# EAGLE board IRTransmitter (EAGLE 6.6.0)
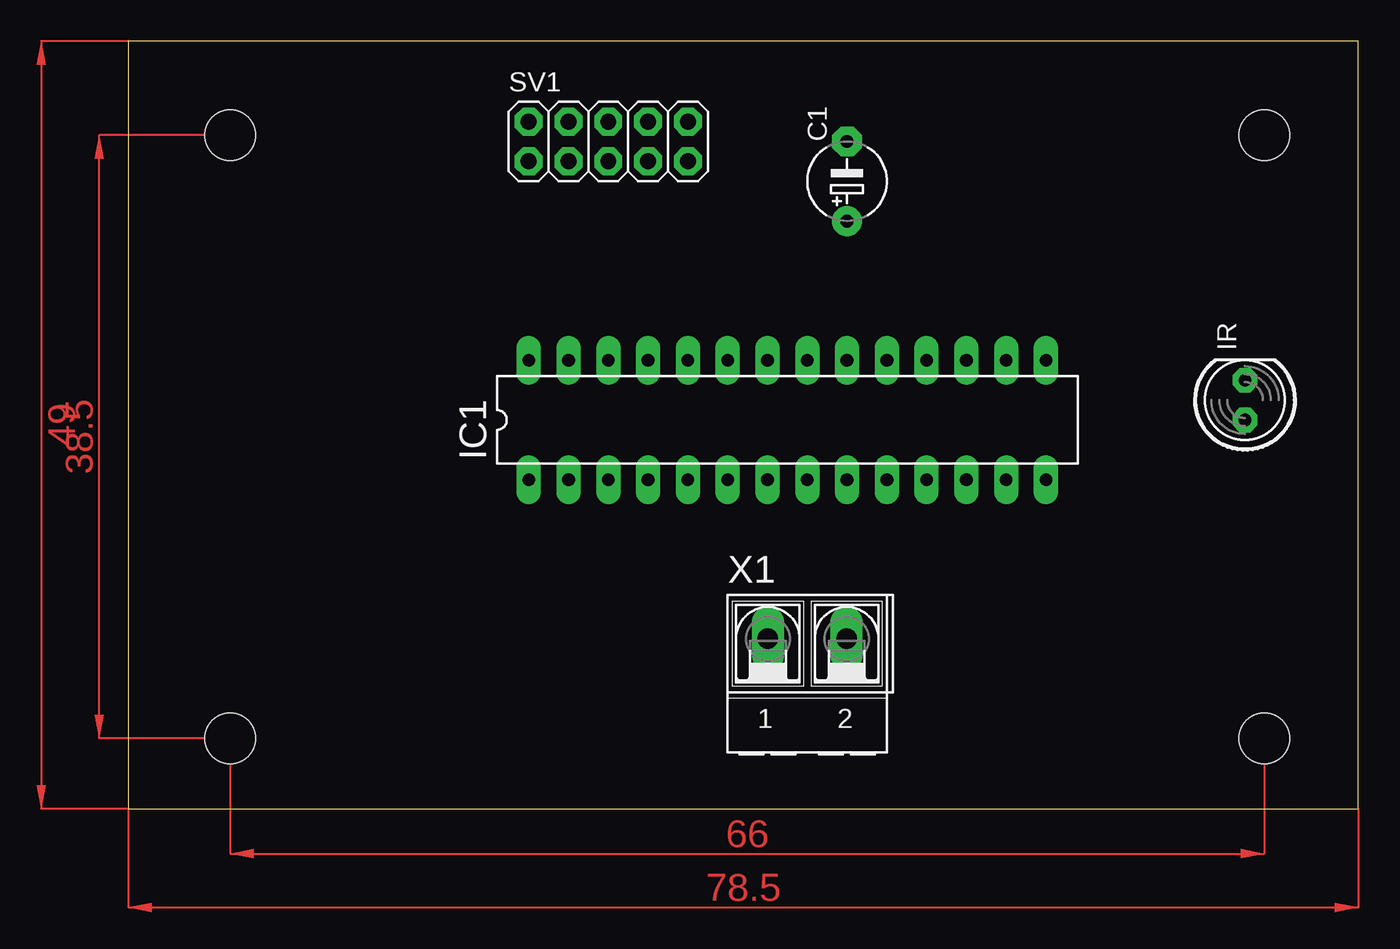
[diagram p0: board, top side]
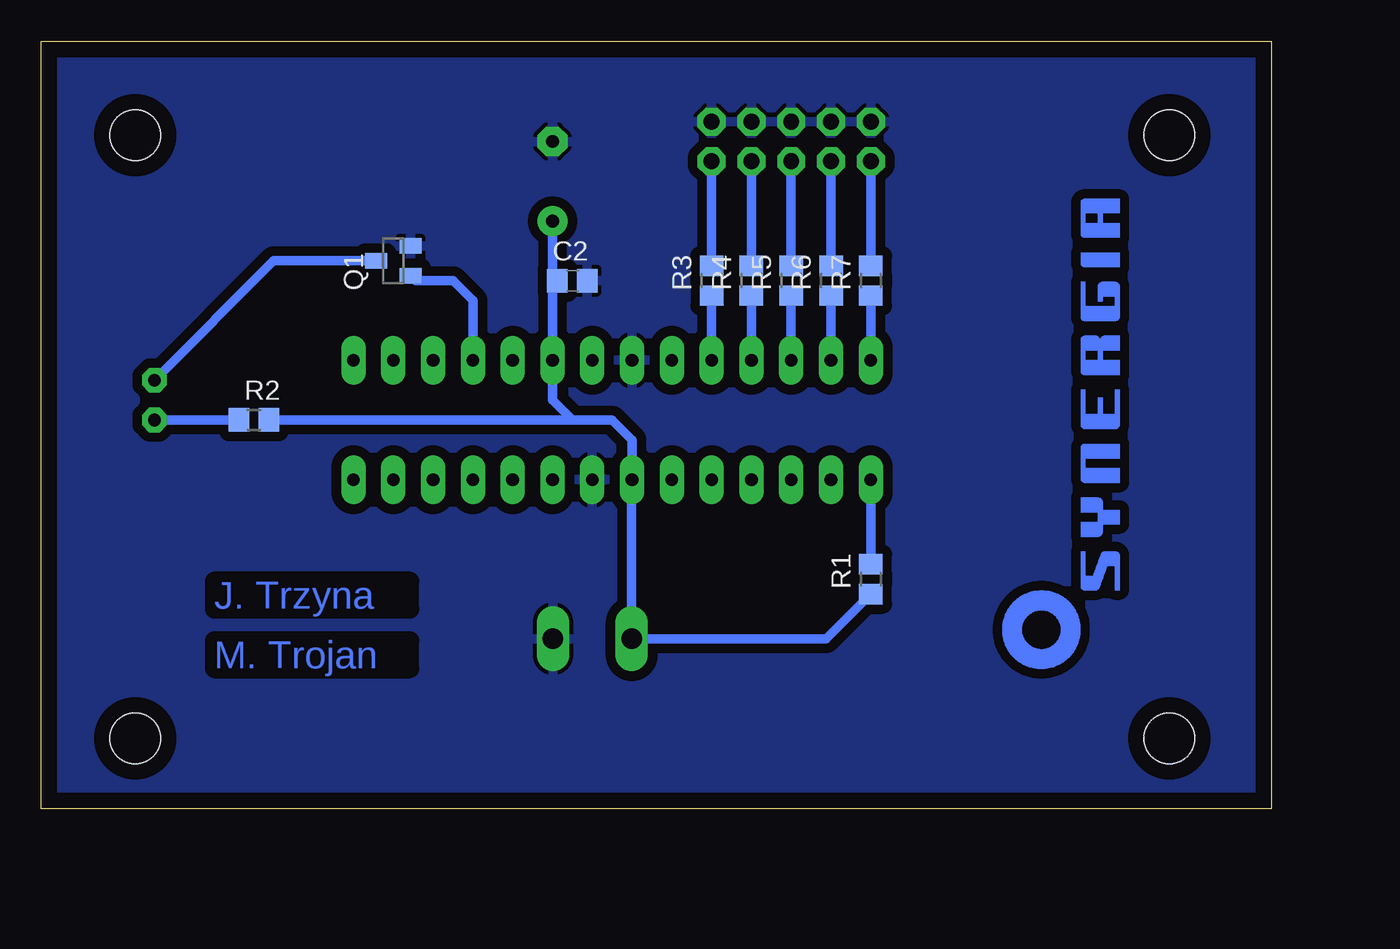
[diagram p1: board, bottom side, seen from below]

Size 78.5 x 49 mm. Coordinates in mm from the lower left corner, seen from the top.
Outline: 0,0 78.5,0 78.5,49 0,49 0,0
Copper layers (1*16): Top 0.035mm / dielectric 1.5mm / Bottom 0.035mm
Design rules "default *": minimum track width 10mil, minimum drill 24mil, track to track 8mil, track to pad 8mil, pad to pad 8mil, via to via 8mil, smd to smd 8mil, copper to edge 40mil, drill to drill 8mil, minimum pad ring 15mil, minimum via ring 8mil, stop-mask expansion 4mil, vias tented up to drill 0mil, thermal gap 10mil
Holes 3.2 mm at 6.5,43 72.5,43 72.5,4.5 6.5,4.5

## Footprints (pad centres in the part's own frame; a part is rotated, then mirrored left to right if it is on the bottom)
E5-5 = drill 0.813 pad 1.905: + -2.54,0 | drill 0.813 pad 1.905 octagon: - 2.54,0
C0805 = smd 1.3 x 1.5: 1 -0.95,0; 2 0.95,0
DIL28-3 = drill 0.813 long: 1 -16.51,-3.81; 2 -13.97,-3.81; 3 -11.43,-3.81; 4 -8.89,-3.81; 5 -6.35,-3.81; 6 -3.81,-3.81; 7 -1.27,-3.81; 8 1.27,-3.81; 9 3.81,-3.81; 10 6.35,-3.81; 11 8.89,-3.81; 12 11.43,-3.81; 13 13.97,-3.81; 14 16.51,-3.81; 15 16.51,3.81; 16 13.97,3.81; 17 11.43,3.81; 18 8.89,3.81; 19 6.35,3.81; 20 3.81,3.81; 21 1.27,3.81; 22 -1.27,3.81; 23 -3.81,3.81; 24 -6.35,3.81; 25 -8.89,3.81; 26 -11.43,3.81; 27 -13.97,3.81; 28 -16.51,3.81
LED5MM = drill 0.813 octagon: A -1.27,0; K 1.27,0
SOT23 = smd 1 x 1.4: 1 -0.95,-1.1; 2 0.95,-1.1; 3 0,1.1
R0805 = smd 1.3 x 1.5: 1 -0.95,0; 2 0.95,0
2X05 = drill 1.016 octagon: 1 -5.08,-1.27; 2 -5.08,1.27; 3 -2.54,-1.27; 4 -2.54,1.27; 5 0,-1.27; 6 0,1.27; 7 2.54,-1.27; 8 2.54,1.27; 9 5.08,-1.27; 10 5.08,1.27
AK500/2-H = drill 1.321 long: 1 -2.515,0; 2 2.515,0

## Placement (x,y rotation side)
C1  22uF  [E5-5]  45.87,40.06 90 top
C2  100nF  [C0805]  44.6,33.71 0 bottom
IC1  MEGA8-P  [DIL28-3]  42.06,24.82 0 top
IR  [LED5MM]  71.27,26.09 90 top
Q1  BSS138  [SOT23]  56.03,34.98 90 bottom
R1  10k  [R0805]  25.55,14.66 90 bottom
R2  150  [R0805]  64.92,24.82 0 bottom
R3  1k  [R0805]  35.71,33.71 90 bottom
R4  1k  [R0805]  33.17,33.71 90 bottom
R5  1k  [R0805]  30.63,33.71 90 bottom
R6  1k  [R0805]  28.09,33.71 90 bottom
R7  1k  [R0805]  25.55,33.71 90 bottom
SV1  [2X05]  30.63,42.6 0 top
U$1  [SYNERGIA_30MM]  9.68,8.95 90 bottom
X1  [AK500/2-H]  43.33,10.85 0 top

## Library data of the parts
C1 C2 R1-R7 = rcl
IC1 = atmel; OC_FARNELL: unknown; OC_NEWARK: unknown
IR = led
Q1 = transistor-small-signal
SV1 = pinhead
U$1 = synergia_logo
X1 = con-ptr500; OC_FARNELL: unknown; OC_NEWARK: unknown

## Nets
GND: C1.- C2.2 IC1.8 IC1.22 Q1.2 SV1.2 SV1.4 SV1.6 SV1.8 SV1.10 X1.2
LED1: R3.2 SV1.9
LED2: R4.2 SV1.7
LED3: R5.2 SV1.5
LED4: R6.2 SV1.3
LED5: R7.2 SV1.1
N$1: IR.A R2.1
N$2: IC1.1 R1.2
N$3: IR.K Q1.3
N$4: IC1.18 Q1.1
N$5: IC1.24 R3.1
N$6: IC1.25 R4.1
N$7: IC1.26 R5.1
N$8: IC1.27 R6.1
N$9: IC1.28 R7.1
VCC: C1.+ C2.1 IC1.7 IC1.20 R1.1 R2.2 X1.1

## Tracks (layer width: path | path; a pad name or v marks a point on that pad's centre or on a via)
GND
  pour Bottom (isolate 0.61): -1.12,50.22 81.43,50.22 81.43,-1.85 -1.12,-1.85
LED1
  Bottom 0.61: R3.2 SV1.9
LED2
  Bottom 0.61: SV1.7 R4.2
LED3
  Bottom 0.61: SV1.5 R5.2
LED4
  Bottom 0.61: SV1.3 R6.2
LED5
  Bottom 0.61: SV1.1 R7.2
N$1
  Bottom 0.61: IR.A R2.1
N$2
  Bottom 0.61: IC1.1 R1.2
N$3
  Bottom 0.61: Q1.3 63.65,34.98 IR.K
N$4
  Bottom 0.61: IC1.18 50.95,32.44 52.22,33.71 54.61,33.71 Q1.1
N$5
  Bottom 0.61: R3.1 IC1.24
N$6
  Bottom 0.61: R4.1 IC1.25
N$7
  Bottom 0.61: R5.1 IC1.26
N$8
  Bottom 0.61: R6.1 IC1.27
N$9
  Bottom 0.61: IC1.28 R7.1
VCC
  Bottom 0.61: R1.1 28.41,10.85 X1.1 40.81,20.98 IC1.7 40.79,23.55 42.06,24.82 44.6,24.82 | 44.6,24.82 45.87,26.09 IC1.20 | IC1.20 45.87,33.39 C2.1 | C2.1 45.87,33.71 IC1.20 | C2.1 45.49,33.77 45.87,34.15 C1.+ | R2.2 44.6,24.82
(copper drawn outside any net)
  shapes: Top area x4

## Text on the board
Bottom: J. Trzyna | M. Trojan